# Altium PCB [R1] Digital - BlackChat.PcbDoc
Units mil, origin at the board's own origin, x right, y up, seen from the top; angles counter-clockwise.
Board outline 1450 x 2000 mil, 2 copper layers (Top Layer, Bottom Layer); 27 components, 27 nets, 166 pads, 10 vias.
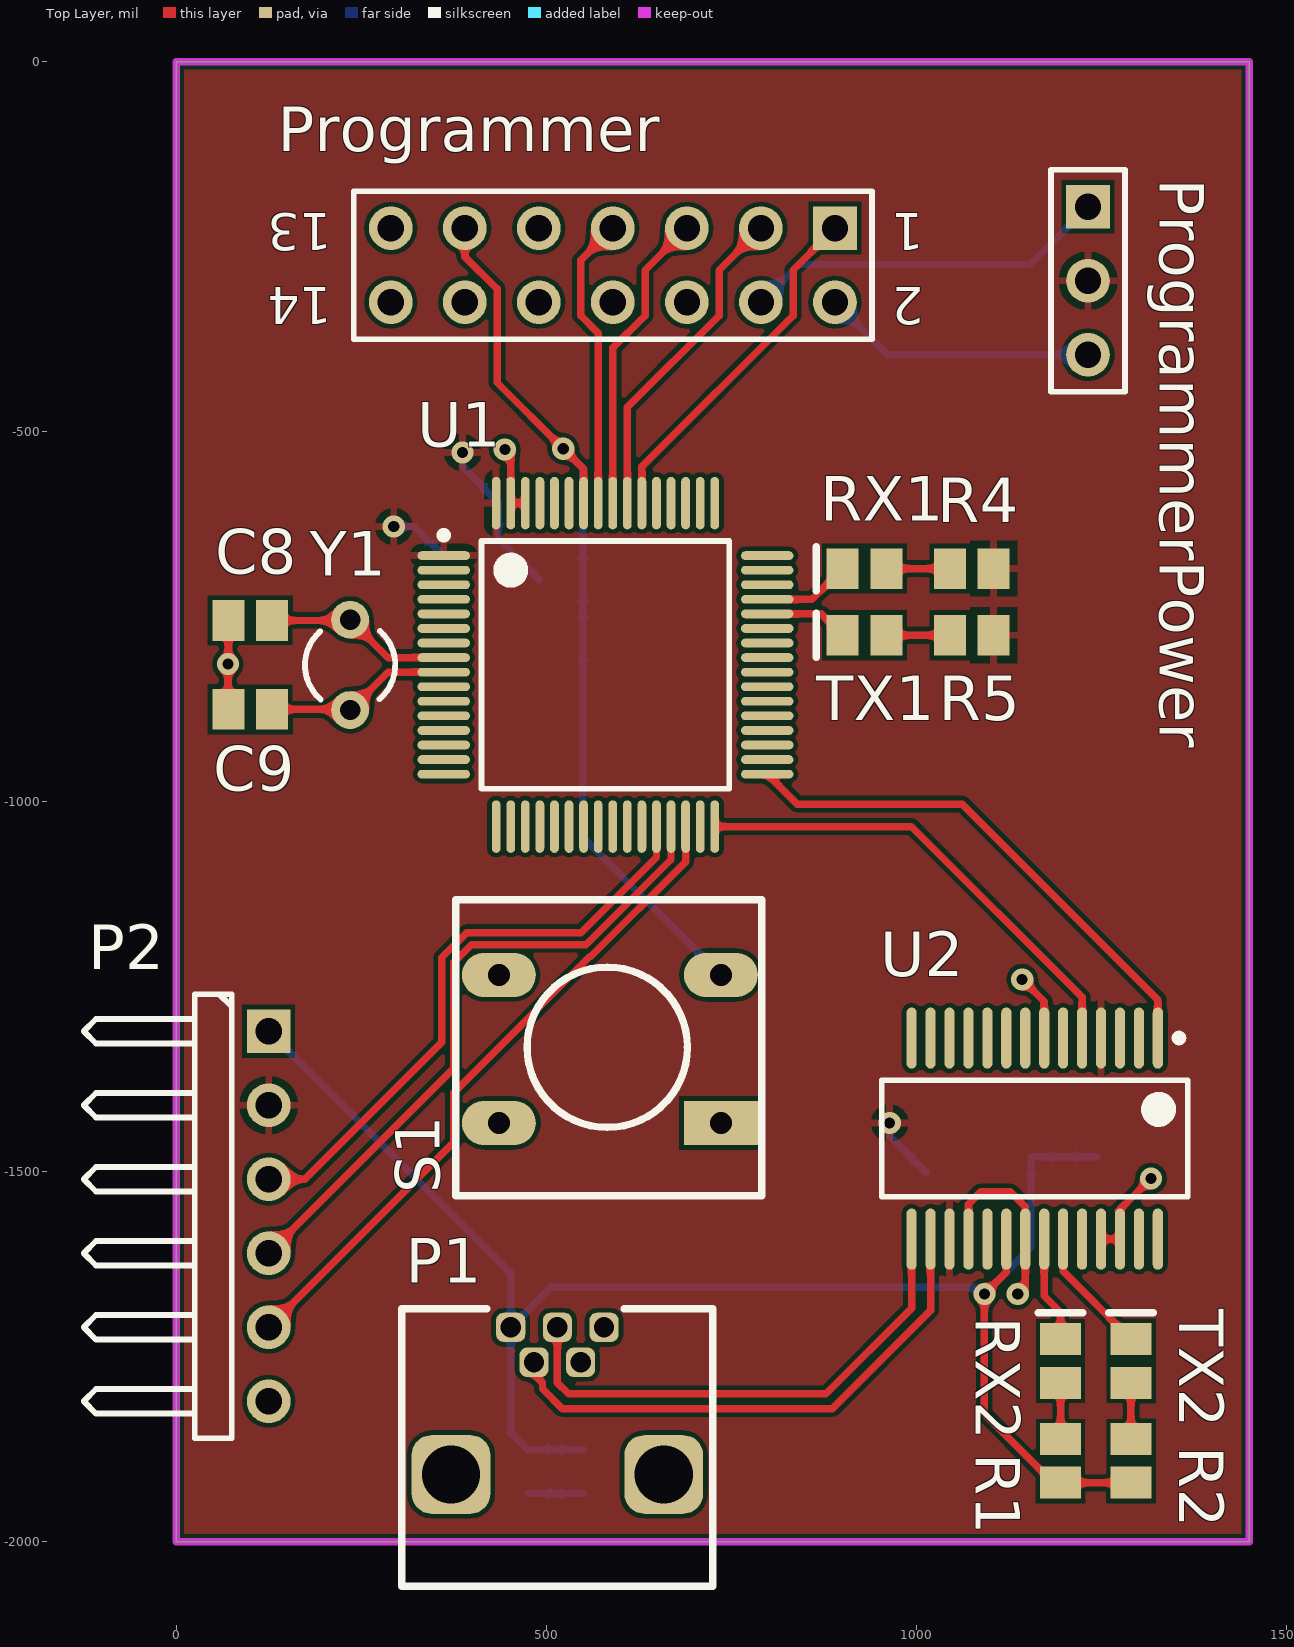
[diagram p0: Top Layer view]
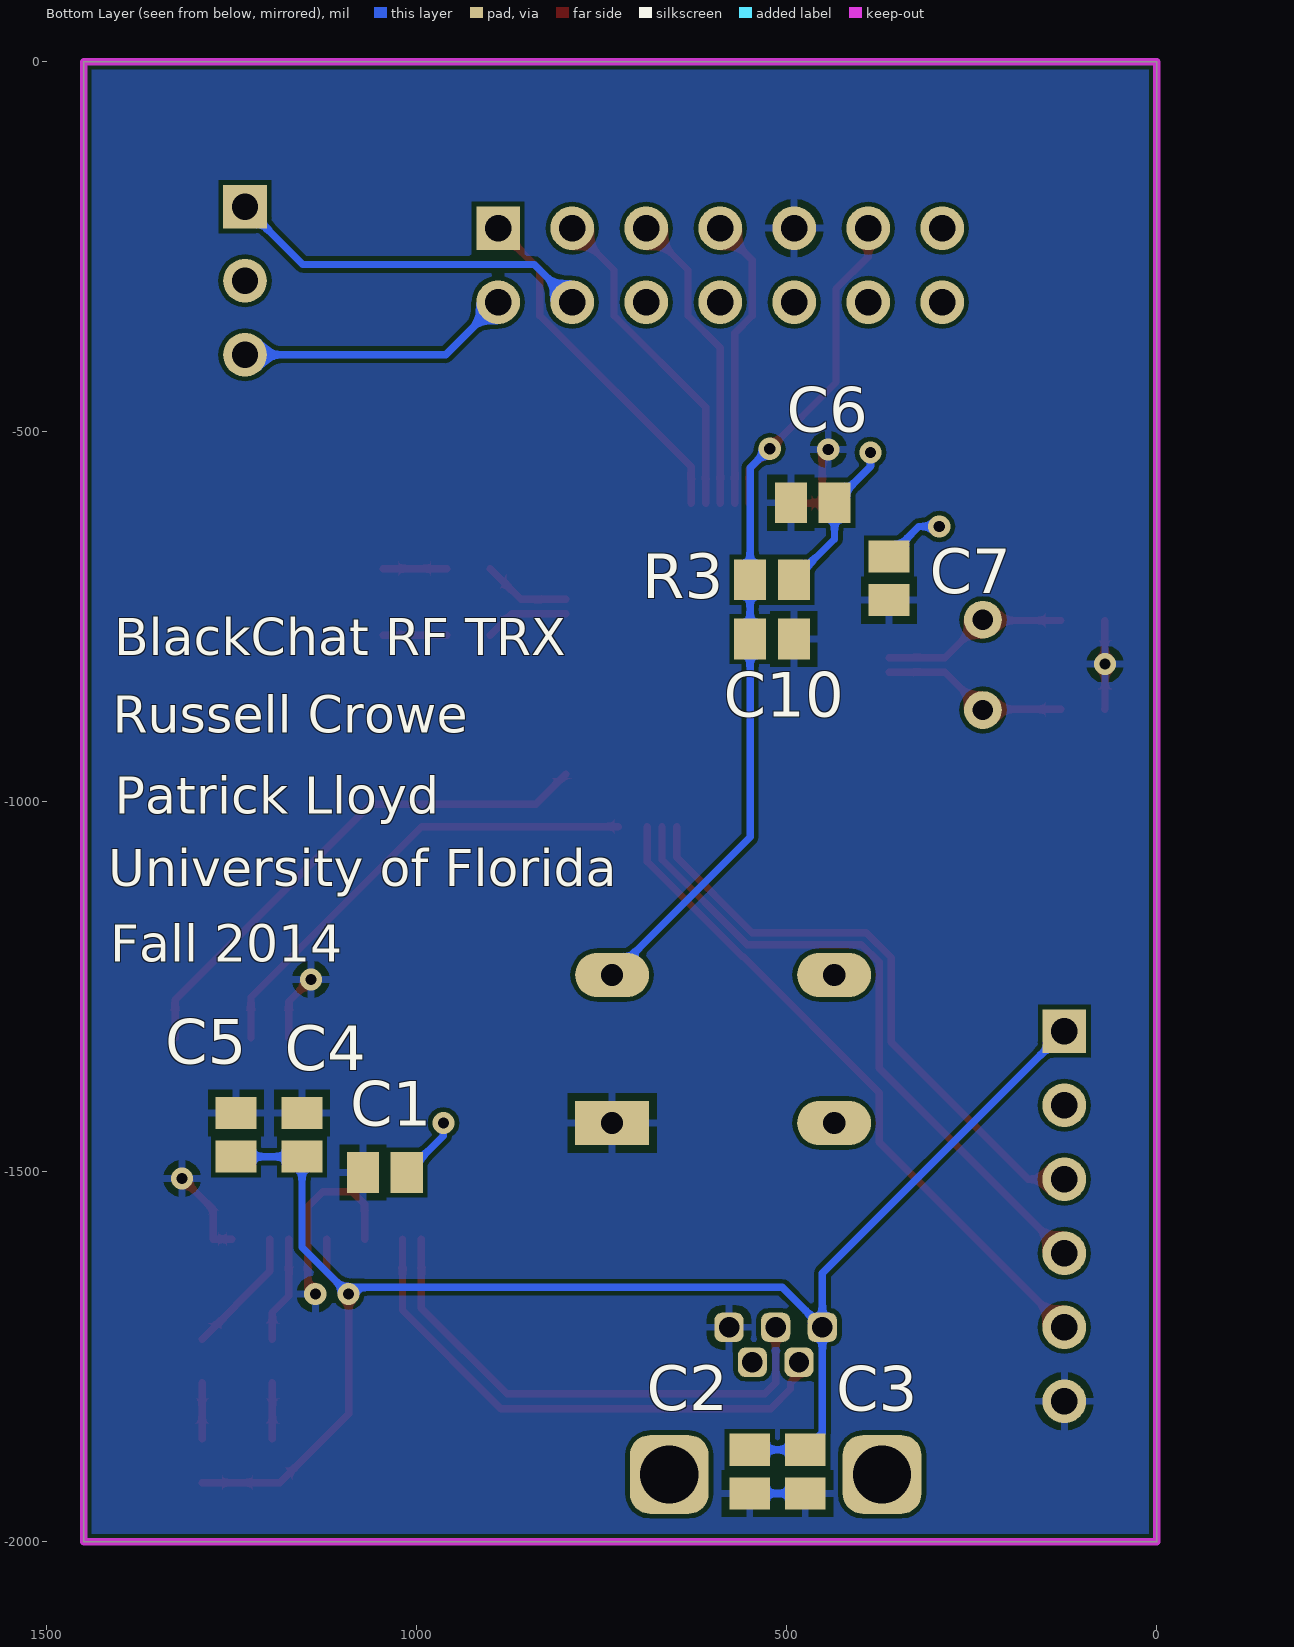
[diagram p1: Bottom Layer view, seen from below]

## Layer stack, top to bottom
Top Solder: solder mask 0.4, Solder Resist, Dk 3.5
Top Layer: signal copper 1.4
Dielectric 1: dielectric 12.6, FR-4, Dk 4.8
Bottom Layer: signal copper 1.4
Bottom Solder: solder mask 0.4, Solder Resist, Dk 3.5

## Board outline
0,0 1450,0 1450,-2000 0,-2000 0,0

## Design rules (kind name [scope] priority, off if disabled: settings)
Clearance MSP [InComponent('U1')] p1: gap=6
Clearance [All] p2: gap=6
DiffPairsRouting [All] p1: maxlimit=10 minlimit=10 mostfreqgap=10 toplayer_minwidth=10 toplayer_maxwidth=15 toplayer_prefwidth=15 bottomlayer_minwidth=10 bottomlayer_maxwidth=15 bottomlayer_prefwidth=15 maxuncoupledlength=500
HoleSize [All] p1: absolutevalues=TRUE maxlimit=100 minlimit=13 maxpercent=80.000 minpercent=20.000
MinimumAnnularRing [All] p1: minimumring=7
PolygonConnect [All] p1: connectstyle=Relief reliefconductorwidth=10 reliefentries=4 polygonreliefangle="90 Angle" airgapwidth=10
RoutingVias [All] p1: holewidth=28 width=50 viastyle="Through Hole" minholewidth=15 minwidth=30 maxholewidth=15 maxwidth=30
SolderMaskExpansion [All] p1: expansion=4
UnpouredPolygon [All] p1: allowunpoured=FALSE
Width [All] p1: maxlimit=20 minlimit=10 preferedwidth=10 minimp=50.000000 maximp=50.000000 favimp=50.000000
27 further rules are at their usual default settings.

## Classes and differential pairs
differential pair USB: +USB_DP -USB_DM
differential pair XINOUT: +XIN -XOUT

## Components (designator, comment, footprint, x,y, rotation, side; value= is the part's Value field where it differs from the comment)
C1 "Cap" CAP-0805 1043,-1501 r0 bottom
C2 "Cap Pol3" CAP-0805 550,-1905 r270 bottom
C3 "Cap" CAP-0805 475,-1905 r90 bottom
C4 "Cap Pol3" CAP-0805 1155,-1450 r90 bottom
C5 "Cap" CAP-0805 1244,-1450 r270 bottom
C6 "Cap Pol3" CAP-0805 465,-596 r0 bottom
C7 "Cap" CAP-0805 362,-698 r90 bottom
C8 "Cap" CAP-0805 100,-755 r180 top
C9 "Cap" CAP-0805 100,-875 r180 top
C10 "Cap" CAP-0805 520,-780 r0 bottom
P1 "USB B mini TH" "USB B mini Molex" 515,-1710 r180 top
P2 "Header 6H" HDR1X6H 125,-1310 r270 top
Programmer "Header 7X2" HDR2X7 890,-225 r180 top
ProgrammerPower "Header 3" HDR1X3 1232,-196 r270 top
R1 "Res1" RES-0805 1195,-1890.47 r270 top
R2 "Res1" RES-0805 1290,-1890.47 r270 top
R3 "Res1" RES-0805 520,-700 r180 bottom
R4 "Res1" RES-0805 1075,-685 r0 top
R5 "Res1" RES-0805 1075,-775 r0 top
RX1 "LED-GREEN" LED-0805 930,-685 r180 top
RX2 "LED-BLUE" LED-0805 1195,-1755.47 r90 top
S1 "SW-PB" "SW PB" 736,-1434 r180 top
TX1 "LED-RED" LED-0805 930,-775 r180 top
TX2 "LED-ORANGE" LED-0805 1290,-1755.47 r90 top
U1 "MSP430F2617TPMR" TI-PM64_N 580,-815 r0 top
U2 "FT232RL-Reel" SSOP-28_N 1160,-1455 r270 top
Y1 "XTAL" R38 235,-815 r0 top

## Footprints (in the part's own frame and the unit in brackets; to place one, negate y for a bottom-side part, rotate by r counter-clockwise, add the part's x,y. Pads: shape width x height; smd on the part's side, far side on the other; paste and mask are expansions set on the pad)
CAP-0805 [mm] "Chip Capacitor, Body 2.0x1.3mm, IPC High Density"
  rect 1.1x1.4 smd: 1(-0.75,0) 2(0.75,0)
  body extent -1.1,-0.72 1.1,0.72, height 1.4
HDR1X3 [mm] "Connector; Header; 3 Position"
  rect 1.5x1.5 hole 0.9: 1(0,0)
  round 1.5 hole 0.9: 2(2.54,0) 3(5.08,0)
  silkscreen extent -1.27,-1.27 6.35,1.27
HDR1X6H [mm] "Connector; Header; 6 Position; Right Angle"
  rect 1.5x1.5 hole 0.9: 1(0,0)
  round 1.5 hole 0.9: 2(2.54,0) 3(5.08,0) 4(7.62,0) 5(10.16,0) 6(12.7,0)
  silkscreen extent -1.27,-6.35 13.97,-1.27
HDR2X7 [mm] "Connector; Header; 7x2 Position"
  rect 1.5x1.5 hole 0.9: 1(0,0)
  round 1.5 hole 0.9: 2(0,2.54) 3(2.54,0) 4(2.54,2.54) 5(5.08,0) 6(5.08,2.54) 7(7.62,0) 8(7.62,2.54) 9(10.16,0) 10(10.16,2.54) 11(12.7,0) 12(12.7,2.54) 13(15.24,0) 14(15.24,2.54)
  silkscreen extent -1.27,-1.27 16.51,3.81
LED-0805 [mm]
  rect 1.1x1.4 smd: 1(-0.75,0) 2(0.75,0)
  silkscreen extent 1.65,-0.76 1.65,0.76, body extent -1.1,-0.72 1.1,0.72, height 1.4
R38 [mm] "Crystal, Thru-Hole; 2 Leads; Body 3.1 x 8.2 mm (Dia.xH)"
  round 1.3 hole 0.7: 1(0,1.55) 2(0,-1.55)
  silkscreen extent -1.55,-1.19 1.55,1.17
RES-0805 [mm] "Chip Resistor, Body 2.0x1.3mm, IPC High Density"
  rect 1.1x1.4 smd: 1(-0.75,0) 2(0.75,0)
  body extent -1.1,-0.72 1.1,0.72, height 1.4
SSOP-28_N [mm]
  oval 2.1x0.35 smd: 1(-3.45,4.225) 2(-3.45,3.575) 3(-3.45,2.925) 4(-3.45,2.275) 5(-3.45,1.625) 6(-3.45,0.975) 7(-3.45,0.325) 8(-3.45,-0.325) 9(-3.45,-0.975) 10(-3.45,-1.625) 11(-3.45,-2.275) 12(-3.45,-2.925) 13(-3.45,-3.575) 14(-3.45,-4.225) 15(3.45,-4.225) 16(3.45,-3.575) 17(3.45,-2.925) 18(3.45,-2.275) 19(3.45,-1.625) 20(3.45,-0.975) 21(3.45,-0.325) 22(3.45,0.325) 23(3.45,0.975) 24(3.45,1.625) 25(3.45,2.275) 26(3.45,2.925) 27(3.45,3.575) 28(3.45,4.225)
  silkscreen extent -3.57,-5.25 2,5.25, body extent -2.8,-5.25 2.8,5.25, height 2
"SW PB" [mil]
  rect 100x60 hole 30: 1(0,0)
  oval 100x60 hole 30: 2(0,-200) 3(300,-200) 4(300,0)
  silkscreen extent -55,-302 358,98
TI-PM64_N [mm] "QFP, 64-Leads, Body 10x10mm, Pitch 0.5mm, IPC Medium Density"
  oval 1.8x0.3 smd: 1(-5.55,3.75) 2(-5.55,3.25) 3(-5.55,2.75) 4(-5.55,2.25) 5(-5.55,1.75) 6(-5.55,1.25) 7(-5.55,0.75) 8(-5.55,0.25) 9(-5.55,-0.25) 10(-5.55,-0.75) 11(-5.55,-1.25) 12(-5.55,-1.75) 13(-5.55,-2.25) 14(-5.55,-2.75) 15(-5.55,-3.25) 16(-5.55,-3.75) 33(5.55,-3.75) 34(5.55,-3.25) 35(5.55,-2.75) 36(5.55,-2.25) 37(5.55,-1.75) 38(5.55,-1.25) 39(5.55,-0.75) 40(5.55,-0.25) 41(5.55,0.25) 42(5.55,0.75) 43(5.55,1.25) 44(5.55,1.75) 45(5.55,2.25) 46(5.55,2.75) 47(5.55,3.25) 48(5.55,3.75)
  oval 0.3x1.8 smd: 17(-3.75,-5.55) 18(-3.25,-5.55) 19(-2.75,-5.55) 20(-2.25,-5.55) 21(-1.75,-5.55) 22(-1.25,-5.55) 23(-0.75,-5.55) 24(-0.25,-5.55) 25(0.25,-5.55) 26(0.75,-5.55) 27(1.25,-5.55) 28(1.75,-5.55) 29(2.25,-5.55) 30(2.75,-5.55) 31(3.25,-5.55) 32(3.75,-5.55) 49(3.75,5.55) 50(3.25,5.55) 51(2.75,5.55) 52(2.25,5.55) 53(1.75,5.55) 54(1.25,5.55) 55(0.75,5.55) 56(0.25,5.55) 57(-0.25,5.55) 58(-0.75,5.55) 59(-1.25,5.55) 60(-1.75,5.55) 61(-2.25,5.55) 62(-2.75,5.55) 63(-3.25,5.55) 64(-3.75,5.55)
  silkscreen extent -5.67,-4.25 4.25,4.57, body extent -5,-5 5,5, height 1.6
"USB B mini Molex" [mm]
  rrect50% 2.7x2.7 hole 2: 0(-3.65,5.05) 0(3.65,5.05)
  rrect50% 1x1 hole 0.7: 1(1.6,0) 2(0.8,1.2) 3(0,0) 4(-1.6,0) 5(-0.8,1.2)
  silkscreen extent -5.33,-0.64 5.33,8.89

## Part data
C1 C3 C5 C7 C8 C9 C10: "Capacitor"
C2 C4 C6: "Polarized Capacitor (Surface Mount)"
P2: "Header, 6-Pin, Right Angle"
Programmer: "Header, 7-Pin, Dual row"
ProgrammerPower: "Header, 3-Pin"
R1 R2 R3 R4 R5: "Resistor"
RX1 RX2 TX1 TX2: library part LED-GENERIC, "Light Emitting Diode"
S1: "DIGIKEY SW400-ND"
U1: "16 MHz Mixed Signal Microcontroller with 92 KB Flash, 8192 B SRAM and 48 GPIOs, -40 to 105 degC, 64-pin QFP (PM), Green (RoHS & no Sb/Br)"
U2: "USB UART Asynchronous Serial Data Transfer Chip, SSOP-28, Tape and Reel"
Y1: "Crystal Oscillator"

## Via types
v1: diameter 30, hole 15, Top Layer to Bottom Layer, 10 vias

## Nets (pads, with @x,y where several pads share a name; then routed paths per layer and width w, separated by ;. In a path a pad name is that pad's centre, name@x,y a point inside that pad or via, vN(x,y) a via of type N, cw(c..) or ccw(c..) an arc to the next point about the centre after c; other vN are vias at no path point)
3V3: C1.1 C6.1 C7.2 P2.2 ProgrammerPower.2 R3.2 R4.2 R5.2 U1.1 U1.64 U2.4 U2.17 | length 387.1
  Bottom Layer w10: v1(294,-628) 321.53,-628 C7.2 ; v1(387,-528) 387,-547.53 C6.1 435.47,-645 R3.2 ; v1(964,-1434) 964,-1451.53 C1.1
5V0: C2.1 C3.2 C4.1 C5.2 P1.1 P2.1 R1.2 R2.2 U2.20 | length 2237
  Top Layer w10: U2.20 1121.61,-1635.39 v1(1092,-1665) 1092,-1826.96 1185.04,-1920 R1.2 R2.2
  Bottom Layer w10: P2.1 452.01,-1637.01 P1.1 ; C2.1 C3.2 452.01,-1852.48 P1.1 ; C5.2 C4.1 1155,-1602 v1(1092,-1665) 1083,-1656 506.01,-1656 P1.1
GND: C1.2 C2.2 C3.1 C4.2 C5.1 C6.2 C7.1 C8.2 C9.2 C10.1 P1.4 P2.6 Programmer.9 S1.1 U1.62 U1.63 U2.7 U2.18 U2.21 U2.25 U2.26 | length 768.5
  Top Layer w10: C9.2 70,-874.53 v1(70,-814) 70.47,-813.53 C8.2 ; v1(444,-524) 452.05,-532.05 U1.63 U1.62 ; U2.18 1070.43,-1543.57 1087,-1527 1127,-1527 1147.2,-1547.2 U2.21 1147.2,-1654.8 v1(1137,-1665) ; v1(1143,-1240) 1172.8,-1269.8 U2.7 ; U2.25 U2.26 1275.16,-1550.84 v1(1317,-1509)
  Bottom Layer w10: C3.1 C2.2
MITO: P2.4 U1.29 | length 892.2
  Top Layer w10: P2.4 375,-1360 375,-1217.02 399.02,-1193 553.63,-1193 668.58,-1078.04 U1.29
MOTI: P2.3 U1.28 | length 812.7
  Top Layer w10: P2.3 173.83,-1510 359,-1324.83 359,-1210.39 392.39,-1177 547,-1177 648.9,-1075.1 U1.28
NetR1_1: R1.1 RX2.1 | length 75.9
  Top Layer w10: R1.1 RX2.1
NetR2_1: R2.1 TX2.1 | length 75.9
  Top Layer w10: R2.1 TX2.1
NetR4_1: R4.1 RX1.1 | length 85.9
  Top Layer w10: RX1.1 R4.1
NetR5_1: R5.1 TX1.1 | length 85.9
  Top Layer w10: TX1.1 R5.1
RECEIVE: RX1.2 U1.45 | length 119.1
  Top Layer w10: U1.45 859.06,-726.42 RX1.2
RX0: U1.33 U2.1 | length 705.9
  Top Layer w10: U1.33 838.94,-1003.07 1062.07,-1003.07 1326.34,-1267.34 U2.1
RX/T\X\: P2.5 U1.30 | length 910.5
  Top Layer w10: P2.5 375,-1460 375,-1393 559,-1209 560.25,-1209 688.27,-1080.99 U1.30
RX_LED: RX2.2 U2.22 | length 144.3
  Top Layer w10: U2.22 1172.8,-1667.8 1195,-1690 RX2.2
TCK: Programmer.7 U1.57 | length 399.3
  Top Layer w10: U1.57 570.16,-366.71 546.47,-343.03 546.47,-268.53 Programmer.7
TDI: Programmer.3 U1.55 | length 446.3
  Top Layer w10: U1.55 609.53,-467.03 733.53,-343.03 733.53,-281.47 Programmer.3
TDO: Programmer.1 U1.54 | length 479.5
  Top Layer w10: U1.54 629.21,-547.34 833.53,-343.03 833.53,-281.47 Programmer.1
TMS: Programmer.5 U1.56 | length 413
  Top Layer w10: U1.56 589.84,-386.71 633.53,-343.03 633.53,-281.47 Programmer.5
TRANSMIT: TX1.2 U1.44 | length 113.9
  Top Layer w10: U1.44 871.57,-746.1 TX1.2
TX0: U1.32 U2.5 | length 647
  Top Layer w10: U1.32 993.5,-1033.5 1223.98,-1263.98 U2.5
TX_LED: TX2.2 U2.23 | length 173.1
  Top Layer w10: U2.23 1198.39,-1634.33 TX2.2
URESETN: C10.2 Programmer.11 R3.1 S1.2 U1.58 | length 1237.8
  Top Layer w10: Programmer.11 390,-263.44 433.53,-306.97 433.53,-433.53 v1(523,-523) 550.47,-550.47 U1.58
  Bottom Layer w10: v1(523,-523) 524,-523 549.53,-548.53 R3.1 C10.2 549.53,-1047.53 S1.2
USB_DM: P1.2 U2.16 | length 727.4
  Top Layer w10: P1.2 483.5,-1773.5 495,-1785 495,-1793.28 521.72,-1820 886.28,-1820 1019.25,-1687.03 U2.16
USB_DP: P1.3 U2.15 | length 701.3
  Top Layer w10: P1.3 515,-1785 530,-1800 878,-1800 993.66,-1684.34 U2.15
VCC_TARGET: Programmer.4 ProgrammerPower.1 | length 495.4
  Bottom Layer w10: Programmer.4 841,-274 1154,-274 ProgrammerPower.1
VCC_TOOL: Programmer.2 ProgrammerPower.3 | length 371.4
  Bottom Layer w10: Programmer.2 961,-396 ProgrammerPower.3
XIN: C8.1 U1.8 Y1.1 | length 253.6
  Top Layer w10: C8.1 233.98,-755 Y1.1 286.18,-805.16 U1.8
XOUT: C9.1 U1.9 Y1.2 | length 253.6
  Top Layer w10: C9.1 233.98,-875 Y1.2 286.18,-824.84 U1.9
pads on no net: P1.0 P1.5 Programmer.6 Programmer.8 Programmer.10 Programmer.12 Programmer.13 Programmer.14 S1.3 S1.4 U1.2 U1.3 U1.4 U1.5 U1.6 U1.7 U1.10 U1.11 U1.12 U1.13 U1.14 U1.15 U1.16 U1.17 U1.18 U1.19 U1.20 U1.21 U1.22 U1.23 U1.24 U1.25 U1.26 U1.27 U1.31 U1.34 U1.35 U1.36 U1.37 U1.38 U1.39 U1.40 U1.41 U1.42 U1.43 U1.46 U1.47 U1.48 U1.49 U1.50 U1.51 U1.52 U1.53 U1.59 U1.60 U1.61 U2.2 U2.3 U2.6 U2.8 U2.9 U2.10 U2.11 U2.12 U2.13 U2.14 U2.19 U2.24 U2.27 U2.28

## Polygon pours and split planes (outlines as drawn)
3V3 on Top Layer "Top Layer-3V3" (solid, pour order 2): 0,0 1450,0 1450,-2000 0,-2000 0,0
GND on Bottom Layer "Bottom Layer-GND" (solid, pour order 4): 0,0 1450,0 1450,-2000 0,-2000 0,0

## Keep-outs
Keep-Out Layer:
  lines w10: 0,-2000 0,0 1450,0 ; 0,-2000 0,-2000 ; 0,-2000 1450,-2000 ; 1450,-2000 1450,-2000 ; 1450,-2000 1450,0 ; 1450,0 1450,0

## Silkscreen, mask and mechanical layers (free items; w line width, h text height)
Bottom Overlay:
  text "BlackChat RF TRX" at 1409,-802 h50
  text "Russell Crowe" at 1411,-907 h50
  text "Patrick Lloyd" at 1408,-1016 h50
  text "University of Florida" at 1417,-1114 h50
  text "Fall 2014" at 1414,-1216 h50

## Text inside footprints (layer, text, board x,y; h text height)
Programmer: Top Overlay "2" at 1010,-305 h50 r180; Top Overlay "1" at 1010,-205 h50 r180; Top Overlay "14" at 210,-305 h50 r180; Top Overlay "13" at 210,-205 h50 r180